# Altium PCB SHMP_MainBoard.PcbDoc (part 1 of 2)
Units mil, origin at the board's own origin, x right, y up, seen from the top; angles counter-clockwise.
Board outline 4724.41 x 2755.91 mil, 4 copper layers (Top Layer, Ground Plane, Power Plane, Bottom Layer), stack 59.692 mil thick; 115 components, 109 nets, 467 pads, 438 vias.
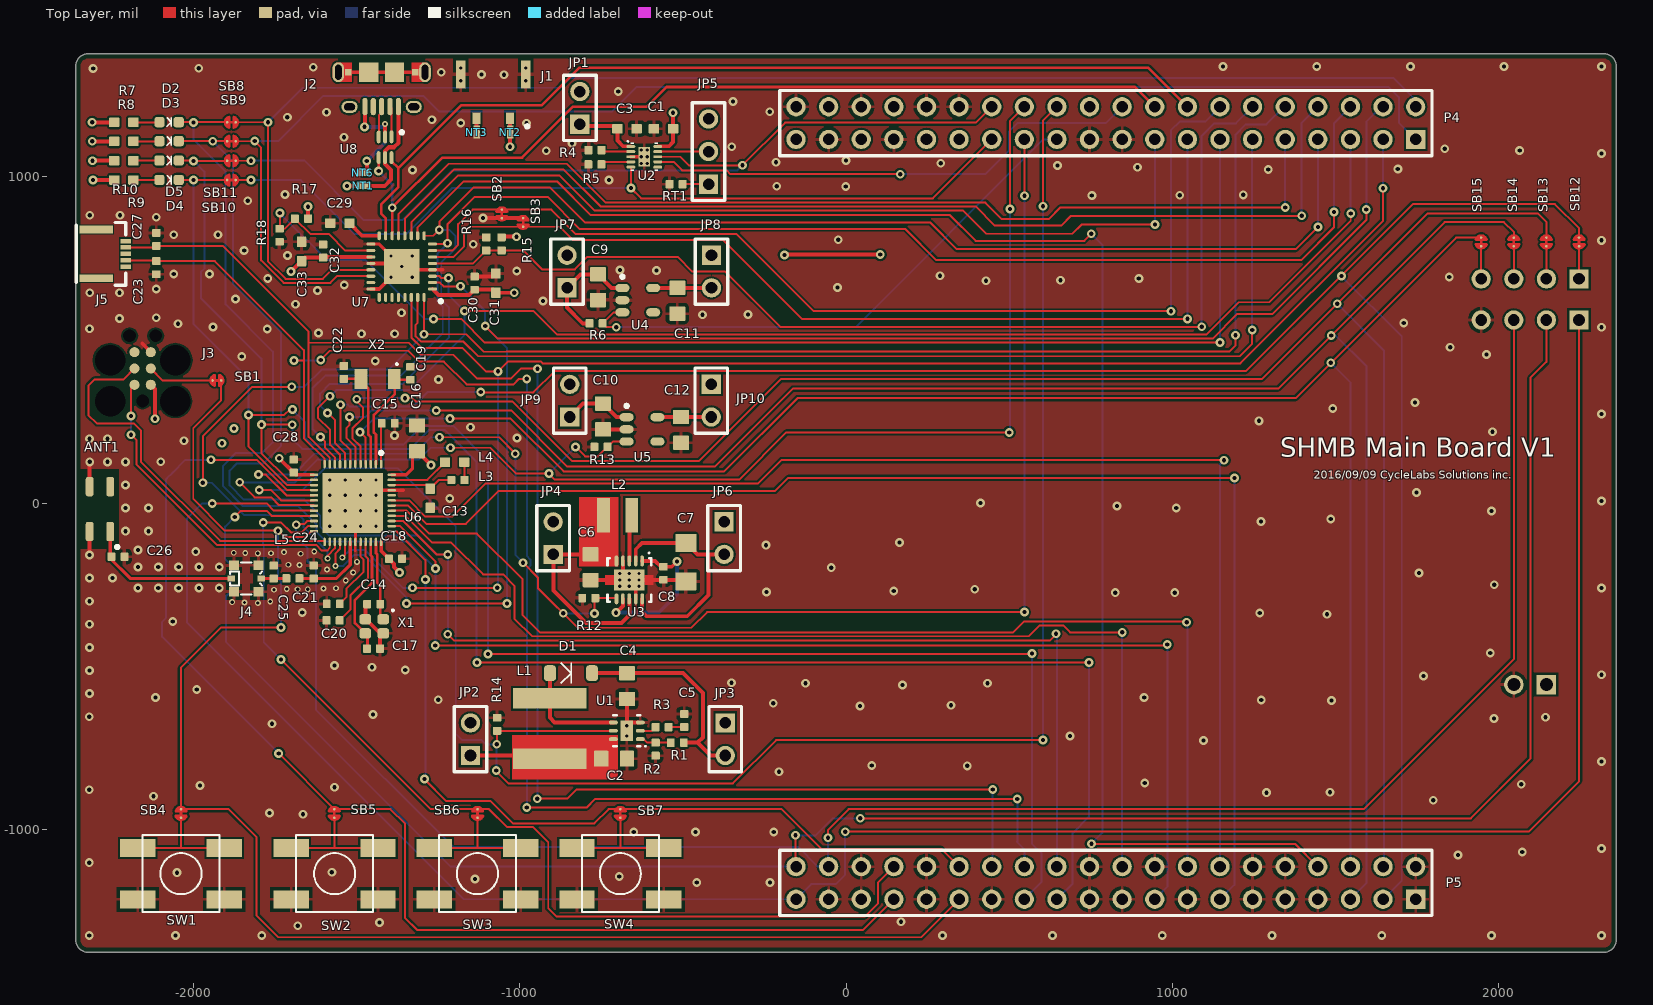
[diagram p0: Top Layer view]
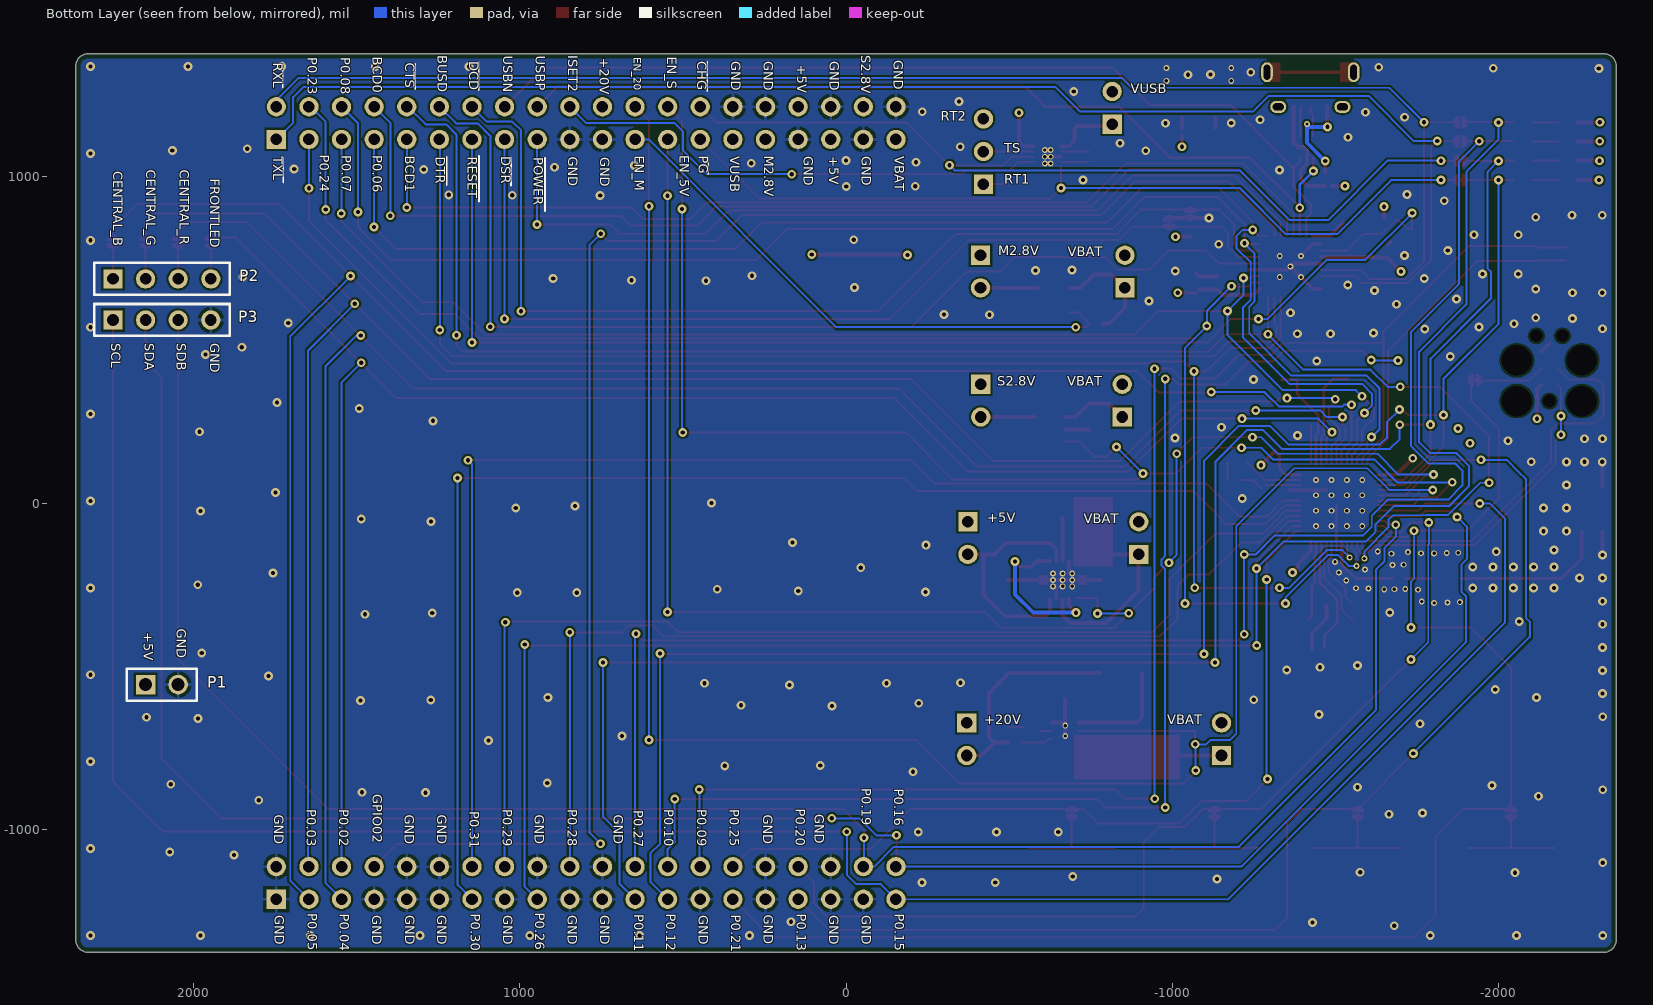
[diagram p1: Bottom Layer view, seen from below]
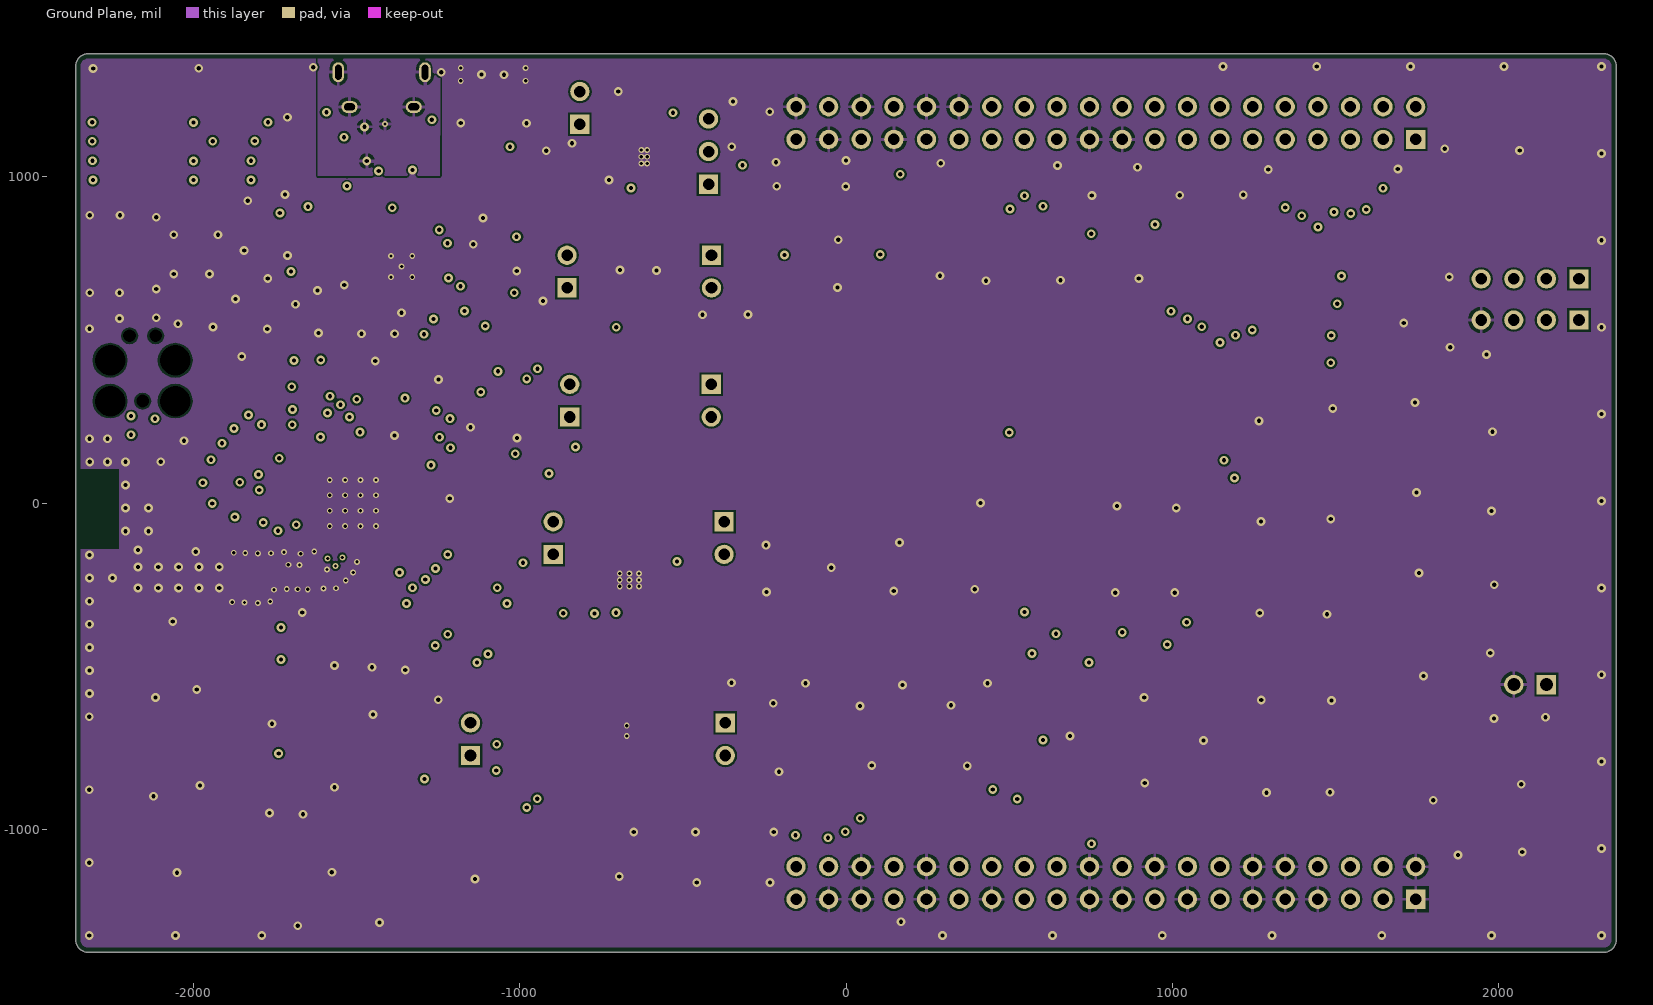
[diagram p2: Ground Plane]
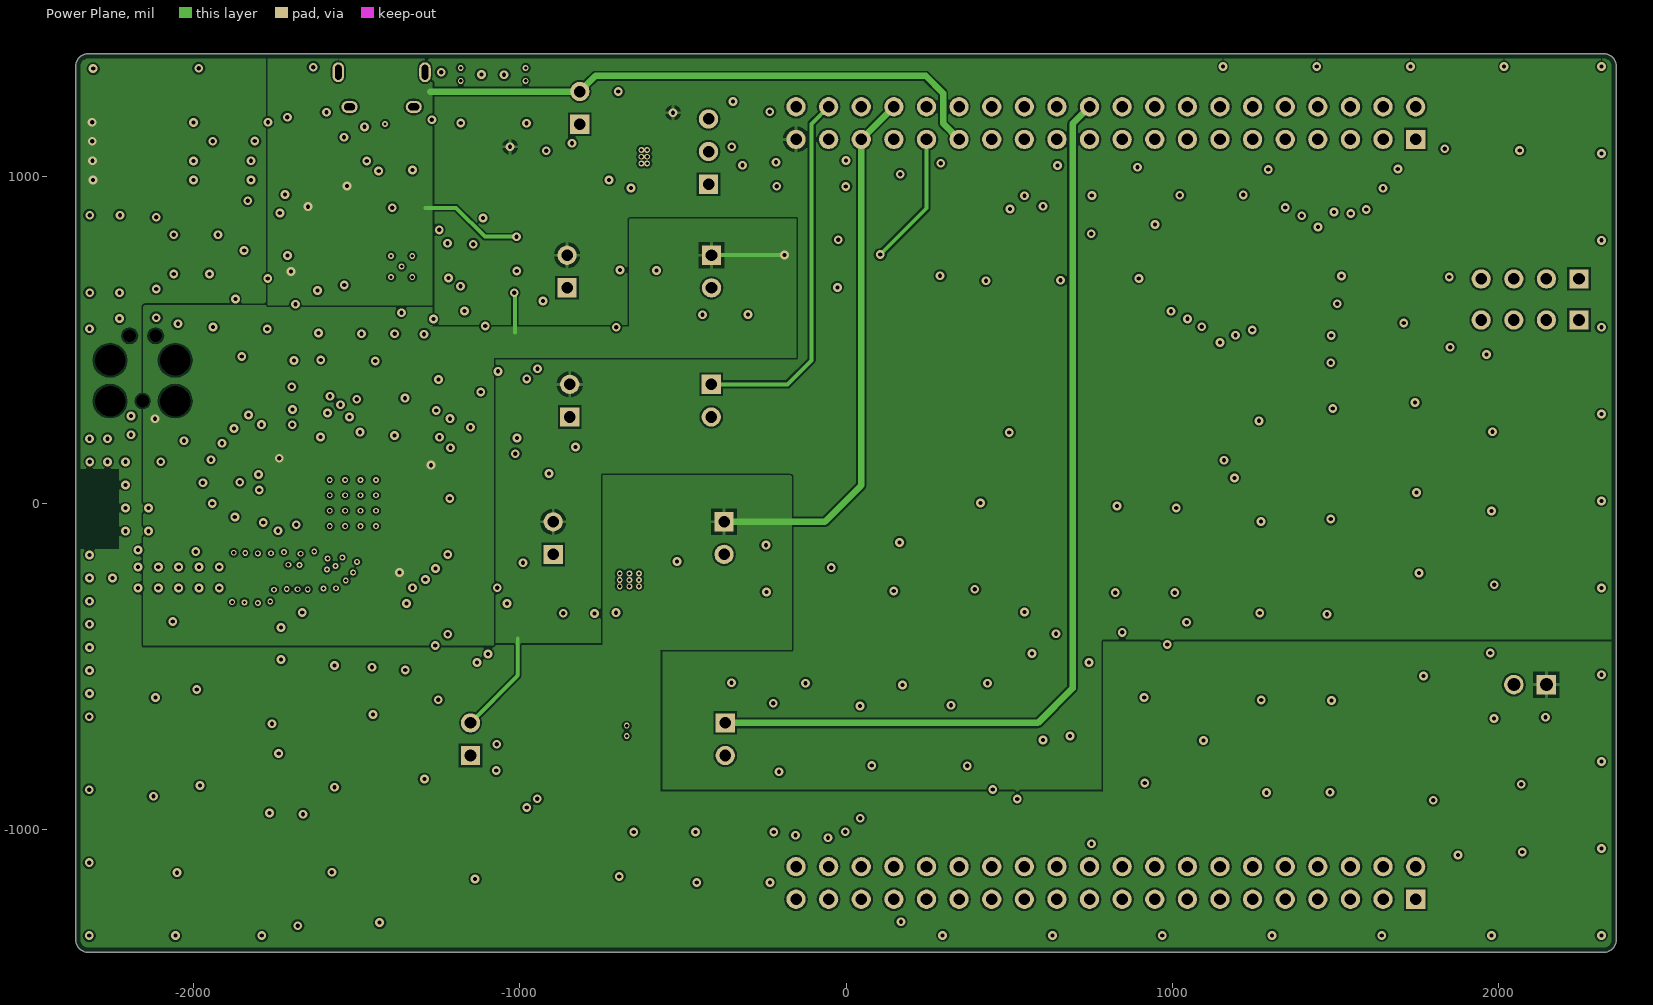
[diagram p3: Power Plane]

## Layer stack, top to bottom
Top Solder: solder mask 1, Solder Resist, Dk 4.8
Top Layer: signal copper 1.38
Prepreg Top: prepreg 6.811, 2116+1080, Dk 4.8
Ground Plane: signal copper 1.38
PCB Core: core 40.55, S1000-2, Dk 4.8
Power Plane: signal copper 1.38
Prepreg Bottom: prepreg 6.811, 2116+1080, Dk 4.8
Bottom Layer: signal copper 1.38
Bottom Solder: solder mask 1, Solder Resist, Dk 4.8

## Board outline
-2362.2,-1338.58 -2362.2,1338.58 cw(c-2322.83,1338.58) -2322.83,1377.95 2322.83,1377.95 cw(c2322.83,1338.58) 2362.2,1338.58 2362.2,-1338.58 cw(c2322.83,-1338.58) 2322.83,-1377.95 -2322.83,-1377.95 cw(c-2322.83,-1338.58)

## Design rules (kind name [scope] priority, off if disabled: settings)
AcuteAngle [All] p1: minimum=6.00000000000000E+0001 checktracksonly=TRUE
AssemblyTestPointUsage AssemblyTestPointUsage_NoTP [InNet('ANT') Or InNet('RF') Or InNet('NetC20_2')  Or InNet('P0.09/NFC1') Or InNet('P0.10/NFC2') Or InNet('XC_N') Or InNet('XC_P') Or InNet('XL_N') Or InNet('XL_P')] p1: valid=1
AssemblyTestPointUsage AssemblyTestPointUsage_Power [InNet('VDD_NRF') Or InNet('VLED') OR InNet('PGND') OR InNet('GND') OR InNet('VBZ') OR InNet('VUSB') Or InNet('VBAT') Or InNet('DGND') Or InNet('AGND') Or InNet('S2V8')] p2: allowmultiple=TRUE
AssemblyTestPointUsage [All] p3:
AssemblyTestpoint AssemblyTestpoint_TP [InComponent('TP*')] p1: testpointundercomponent=TRUE minsize=35 maxsize=59.06 preferedsize=35 minholesize=0 maxholesize=39.37 preferedholesize=10 testpointgrid=1 usegrid=FALSE gridoriginx=2810.98 gridoriginy=2760.98 gridtolerance=0.01 allowsidebottom=TRUE minspacing=83
AssemblyTestpoint AssemblyTestpoint_ShortComponents [((IsPad And (OnTopLayer Or OnBottomLayer)) Or (IsVia) Or (IsPad And OnMultiLayer)) And (IsComponent And (Height < 150))] p2: testpointundercomponent=TRUE minsize=35 maxsize=59.06 preferedsize=35 minholesize=0 maxholesize=39.37 preferedholesize=10 testpointgrid=1 usegrid=FALSE gridoriginx=2810.98 gridoriginy=2760.98 gridtolerance=0.01 allowsidebottom=TRUE minspacing=83 compbodyclearance=40
AssemblyTestpoint AssemblyTestpoint_TallComponents [(IsPad And (OnTopLayer Or OnBottomLayer)) Or (IsVia) Or (IsPad And OnMultiLayer)] p3: testpointundercomponent=TRUE minsize=35 maxsize=59.06 preferedsize=35 minholesize=0 maxholesize=39.37 preferedholesize=10 testpointgrid=1 usegrid=FALSE gridtolerance=0.01 allowsidebottom=TRUE minspacing=83 compbodyclearance=55
BoardOutlineClearance BoardOutlineClearance_Component [IsComponent] p1: gap=66
BoardOutlineClearance [All] p2: gap=15
Clearance Clearance_JLINK [InComponent('J3') vs InComponent('J3')] p1: gap=0
Clearance Clearance_Hole_Copper [InPadClass('NPTH')] p2: gap=8
Clearance Clearance_ISSIDrivers [HasFootprint('QFN-44') Or HasFootprint('DFN10')] p3: gap=4
Clearance Clearance_NFCConn [HasFootprint('Molex 051281-0594')] p4: gap=4
Clearance [All] p5: gap=6
ComponentClearance ComponentClearance_COAXSWITCH [HasFootprint('COAXIAL-SWF') Or InComponent('TP*')] p1: gap=0 collisioncheckmode=3 verticalgap=0 showdistances=FALSE
ComponentClearance [All] p2: gap=10 collisioncheckmode=3 verticalgap=10 showdistances=FALSE
DiffPairsRouting [Not InDifferentialPair('BZ_OUT')] p1: maxlimit=10 minlimit=6 mostfreqgap=8 toplayer_minwidth=6 toplayer_maxwidth=10 toplayer_prefwidth=8 midlayer1_minwidth=6 midlayer1_maxwidth=10 midlayer1_prefwidth=8 midlayer2_minwidth=6 midlayer2_maxwidth=10 midlayer2_prefwidth=8 bottomlayer_minwidth=6 bottomlayer_maxwidth=10 bottomlayer_prefwidth=8 maxuncoupledlength=500
FabricationTestPointUsage FabricationTestPointUsage_NoTP [InNet('ANT') Or InNet('RF') Or InNet('NetC20_2') Or InNet('P0.09/NFC1') Or InNet('P0.10/NFC2') Or InNet('XC_N') Or InNet('XC_P') Or InNet('XL_N') Or InNet('XL_P')] p1: valid=1 allowmultiple=FALSE
FabricationTestPointUsage FabricationTestPointUsage_Power [InNet('VDD_NRF') Or InNet('VLED') OR InNet('PGND') OR InNet('GND') OR InNet('VBZ') OR InNet('VUSB') Or InNet('VBAT') Or InNet('DGND') Or InNet('AGND') Or InNet('S2V8')] p2: valid=0 allowmultiple=TRUE
FabricationTestPointUsage [All] p3: valid=0 allowmultiple=FALSE
FabricationTestpoint FabricationTestpoint_TP [InComponent('TP*')] p1: side=2 testpointundercomponent=TRUE minsize=35 maxsize=59.06 preferedsize=35 minholesize=0 maxholesize=39.37 preferedholesize=10 testpointgrid=1 allowsidebottom=TRUE usegrid=FALSE gridtolerance=0.01 minspacing=83
FabricationTestpoint FabricationTestpoint_ShortComponents [((IsPad And (OnTopLayer Or OnBottomLayer)) Or (IsVia) Or (IsPad And OnMultiLayer)) And (IsComponent And (Height < 150))] p2: side=2 testpointundercomponent=TRUE minsize=35 maxsize=59.06 preferedsize=35 minholesize=0 maxholesize=39.37 preferedholesize=10 testpointgrid=1 allowsidebottom=TRUE usegrid=FALSE gridtolerance=0.01 minspacing=83 compbodyclearance=40
FabricationTestpoint FabricationTestpoint_TallComponents [(IsPad And (OnTopLayer Or OnBottomLayer)) Or (IsVia) Or (IsPad And OnMultiLayer)] p3: side=2 testpointundercomponent=TRUE minsize=35 maxsize=59.06 preferedsize=35 minholesize=0 maxholesize=39.37 preferedholesize=10 testpointgrid=1 allowsidebottom=TRUE usegrid=FALSE gridoriginx=2810.98 gridoriginy=2760.98 gridtolerance=0.01 minspacing=83 compbodyclearance=55
FanoutControl Fanout_LCC [IsLCC] p1: bgadir=Out bgaviamode=Centered fanoutstyle=Auto fanoutdirection=Alternating viagrid=1 // Fanout_LCC (Default Rule)
FanoutControl Fanout_BGA [IsBGA] p2: bgadir=Out bgaviamode=Centered fanoutstyle=Auto fanoutdirection=Alternating viagrid=1 // Fanout_BGA (Default Rule)
FanoutControl Fanout_Small [(CompPinCount < 5)] p3: bgadir=Out bgaviamode=Centered fanoutstyle=Auto fanoutdirection=OutThenIn viagrid=1 // Fanout_Small (Default Rule)
FanoutControl Fanout_SOIC [IsSOIC] p4: bgadir=Out bgaviamode=Centered fanoutstyle=Auto fanoutdirection=Alternating viagrid=1 // Fanout_SOIC (Default Rule)
Height HeightTop [OnTop] p1 off: minheight=0 maxheight=84.25 prefheight=78.74
Height HeightBottom [TouchesRoom('BatteryRoom')] p2 off: minheight=0 maxheight=78.74 prefheight=39.37
HoleSize [All] p1: absolutevalues=TRUE maxlimit=100 minlimit=10 maxpercent=80.000 minpercent=20.000
HoleToHoleClearance [All] p1: gap=6 allowstackedmicrovias=TRUE
MinimumAnnularRing [All] p1: minimumring=4
MinimumSolderMaskSliver MinimumSolderMaskSliver_QFN_DFN [IsVia And (HasFootprint('DSQ10-1500X900TP') Or HasFootprint('QFN-44')) vs IsVia And (HasFootprint('DSQ10-1500X900TP') Or HasFootprint('QFN-44'))] p1: minsoldermaskwidth=0
MinimumSolderMaskSliver MinimumSolderMaskSliver_QFN_DFN_1 [HasFootprint('QFN40P600X600X90-48N') Or HasFootprint('DSQ10-1500X900TP') Or HasFootprint('DRC10-2400X1650TP') Or HasFootprint('DRV6-1600X1000TP') Or HasFootprint('WDFN8') Or HasFootprint('59453061110ECHLF') vs HasFootprint('QFN40P600X600X90-48N') Or HasFootprint('DSQ10-1500X900TP') Or HasFootprint('DRC10-2400X1650TP') Or HasFootprint('DRV6-1600X1000TP') Or HasFootprint('WDFN8') Or HasFootprint('59453061110ECHLF')] p2: minsoldermaskwidth=2
MinimumSolderMaskSliver MinimumSolderMaskSliver_QFN_DFN_2 [IsPad And (HasFootprint('QFN-44')) vs IsPad And (HasFootprint('QFN-44'))] p3: minsoldermaskwidth=0
MinimumSolderMaskSliver [All] p4: minsoldermaskwidth=4
PolygonConnect PolygonConnect_Direct [(IsVia And InNet('GND')) Or (IsVia And InNet('+5V')) Or (IsVia And InNet('+20V')) Or (IsVia And InNet('VBUS')) Or (IsVia And InNet('VUSB')) Or (IsVia And InNet('S2.8V')) Or (IsVia And InNet('VDD_NRF')) Or HasFootprint('NetTiePWR')] p1: connectstyle=Direct reliefconductorwidth=10 reliefentries=4 polygonreliefangle="90 Angle" airgapwidth=10
PolygonConnect [All] p2: connectstyle=Relief reliefconductorwidth=10 reliefentries=4 polygonreliefangle="90 Angle" airgapwidth=10
RoutingVias [All] p1: holewidth=13 width=27 viastyle="Through Hole" minholewidth=10 minwidth=18 maxholewidth=28 maxwidth=50
SilkToBoardRegionClearance SilkToBoardRegionClearance_1 [All] p2:
SolderMaskExpansion SolderMaskExpansion_QFN_DFN_SON_Molex [HasFootprint('QFN-44') Or HasFootprint('QFN40P600X600X90-48N') Or HasFootprint('DRC10-2400X1650TP') Or HasFootprint('DSQ10-1500X900TP') Or HasFootprint('QFN-32-TP') Or HasFootprint('DRV6-1600X1000TP') Or HasFootprint('Molex 051281-0594')] p1: expansion=0
SolderMaskExpansion [All] p2: expansion=3
Width Width_RF [InNet('ANT') Or InNet('RF') Or InNet('NetC17_2')] p1 off: maxlimit=20 minlimit=10.43 preferedwidth=15 toplayer_maxwidth=10.43 toplayer_prefwidth=10.43 midlayer1_minwidth=12 midlayer2_minwidth=12 bottomlayer_maxwidth=10.43 bottomlayer_prefwidth=10.43 impedancedriven=TRUE minimp=0.000000 maximp=500.000000 favimp=200.000000
Width Width_Power [InNet('VBAT_P') Or InNet('+5V') Or InNet('+20V') Or InNet('VDD_NRF') Or InNet('S2.8V') Or InNet('AVDD') Or InNet('GND') Or InNet('AGND') Or InNet('PGND') Or InNet('DGND') Or InNet('VUSB') Or InNet('VBUS') Or InNet('NetC3_1') Or InNet('VBAT') Or InNet('NetC2_1') Or InNet('NetC4_1') Or InNet('NetC6_1') Or InNet('NetC7_1') Or InNet('NetC9_1') Or InNet('VAUX') Or InNet('NetC10_1') Or InNet('NetC11_1') Or InNet('NetC12_1') Or InNet('NetD1_2') Or InNet('NetL2_2') Or InNet('VCCD') Or InNet('VBAT_N') Or InNet('USBGND')] p2: maxlimit=50 minlimit=8 preferedwidth=12
Width [All] p3: maxlimit=16 minlimit=6 preferedwidth=6
16 further rules are at their usual default settings.

## Classes and differential pairs
component class 1_TOP: D2 D3 D4 D5 J1 J2 J3 P1 P2 P3 P4 P5 P? R7 R8 R9 R10 SB1 SB4 SB5 SB6 SB7 SB8 SB9 SB10 SB11 SB12 SB13 SB14 SB15 SW1 SW2 SW3 SW4
component class U_2_PWR: C1 C2 C3 C4 C5 C6 C7 C8 C9 C10 C11 C12 C? D1 JP1 JP2 JP3 JP4 JP5 JP6 JP7 JP8 JP9 JP10 L1 L2 NT2 NT3 R1 R2 R3 R4 R5 R6 RT1 U1 U2 U3 U4 U5
component class U_3_BLE: ANT1 C13 C14 C15 C16 C17 C18 C19 C20 C21 C22 C23 C24 C25 C26 C27 C28 J4 J5 L3 L4 L5 L6 L7 R12 R13 R14 U6 X1 X2
component class U_4_MISC: C29 C30 C31 C32 C33 NT1 NT6 R15 R16 R17 R18 SB2 SB3 U7 U8
differential pair XL: +XL_P -XL_N
differential pair XC: +XC_P -XC_N
differential pair USB_D: +USB_D_P -USB_D_N

## Components (designator, comment, footprint, x,y, rotation, side; value= is the part's Value field where it differs from the comment)
ANT1 "#NAME?" 2450AT42E010B -2287.88,-18.7 r270 top
C1 "4.7 uF" Varitron_CAP0603 -559.6,1147.8 r180 top
C2 "4.7 uF" Varitron_CAP0805 -711.2,-784.1 r0 top
C3 "4.7 uF" Varitron_CAP0603 -671.6,1147.8 r0 top
C4 "4.7 uF" Varitron_CAP0805 -671.7,-561.3 r270 top
C5 "680 pF" Varitron_CAP0402 -496.1,-666.8 r90 top
C6 "10 uF" Varitron_CAP0805 -782.8,-196.89 r270 top
C7 "47 uF" Varitron_CAP1206 -490.5,-181.49 r270 top
C8 "100 nF" Varitron_CAP0402 -559.7,-215.49 r270 top
C9 "10 uF" Varitron_CAP0805 -760.3,661.7 r270 top
C10 "10 uF" Varitron_CAP0805 -745.3,265.2 r270 top
C11 "10 uF" Varitron_CAP0805 -517.2,620.2 r270 top
C12 "10 uF" Varitron_CAP0805 -505.7,224.1 r270 top
C13 "1.0 uF" Varitron_CAP0603 -1275.1,14.6 r270 top
C14 "12 pF" Varitron_CAP0402 -1448.3,-309.8 r180 top
C15 "100 nF" Varitron_CAP0402 -1403.6,244.3 r0 top
C16 "4.7 uF" Varitron_CAP0805 -1315.4,198.4 r90 top
C17 "12 pF" Varitron_CAP0402 -1449,-446.3 r0 top
C18 "100 nF" Varitron_CAP0402 -1381.2,-170.8 r0 top
C19 "12 pF" Varitron_CAP0402 -1335.7,397.8 r270 top
C20 "100 pF" Varitron_CAP0402 -1572.6,-359.9 r180 top
C21 "DNP" Varitron_CAP0402 -1572.3,-309.4 r180 top
C22 "12 pF" Varitron_CAP0402 -1539.8,400.5 r270 top
C23 "300 pF" Varitron_CAP0402 -2114.8,721.7 r270 top
C24 "0.8 pF" VARITRON_CAP0402 -1632.38,-211.5 r270 top
C25 "DNP" VARITRON_CAP0402 -1754.98,-211.7 r270 top
C26 "1.2 pF" VARITRON_CAP0402 -2232.48,-164.7 r180 top
C27 "300 pF" Varitron_CAP0402 -2114.8,808.3 r90 top
C28 "100 nF" Varitron_CAP0402 -1693.7,113.4 r90 top
C29 "1.0 uF" Varitron_CAP0603 -1552,858.2 r180 top
C30 "100 nF" Varitron_CAP0402 -1138.9,674.1 r90 top
C31 "4.7 uF" Varitron_CAP0603 -1073.6,674.3 r90 top
C32 "100 nF" Varitron_CAP0402 -1603.5,772.8 r90 top
C33 "4.7 uF" Varitron_CAP0603 -1669.5,771.3 r90 top
D1 "#NAME?" ONSC-SOD-123-2-425-04_V -843.2,-521.4 r180 top
D2 "LTST-C191KGKT" LTST-C191KGKT -2075.7,1167.8 r180 top
D3 "LTST-C191KGKT" LTST-C191KGKT -2075.7,1109.5 r180 top
D4 "LTST-C191KGKT" LTST-C191KGKT -2075.7,990.8 r180 top
D5 "LTST-C191KGKT" LTST-C191KGKT -2075.7,1050.1 r180 top
J1 "BM02(3)B-ADHSS-GAN-ETB" BM02(3)B-ADHSS-GAN-ETB -1081.7,1180.4 r270 top
J2 "10118194-0001LF" 10118194-0001LF -1423.83,1215.59 r180 top
J3 "" JLINK_6PIN_NEEDLE_ADAPTER -2156.8,412.5 r90 top
J4 "#NAME?" COAXIAL-SWF -1839.08,-231.4 r270 top
J5 "#NAME?" "Molex 051281-0594" -2208.5,803.28 r270 top
JP1 "JMP_2PINS_100MILS" HDR_2X1_100MILS -816.1,1161.7 r180 top
JP2 "JMP_2PINS_100MILS" HDR_2X1_100MILS -1151.4,-774.2 r180 top
JP3 "JMP_2PINS_100MILS" HDR_2X1_100MILS -370.2,-674.2 r0 top
JP4 "JMP_2PINS_100MILS" HDR_2X1_100MILS -897.9,-157.68 r180 top
JP5 "JMP_3PINS_100MILS" HDR_1X3_100MILS -421.5,977.7 r90 top
JP6 "JMP_2PINS_100MILS" HDR_2X1_100MILS -373.8,-57.49 r0 top
JP7 "JMP_2PINS_100MILS" HDR_2X1_100MILS -855.3,659.7 r180 top
JP8 "JMP_2PINS_100MILS" HDR_2X1_100MILS -412.5,759.7 r0 top
JP9 "JMP_2PINS_100MILS" HDR_2X1_100MILS -847.1,263.8 r180 top
JP10 "JMP_2PINS_100MILS" HDR_2X1_100MILS -413.1,363.8 r0 top
L1 "10 uH" SRN5020-100M -908.2,-691.5 r90 top
L2 "2.2 uH" SRN3015-2R2M -700.5,-37.89 r0 top
L3 "15 nH" Varitron_IND0402 -1190,70.6 r0 top
L4 "10 uH" Varitron_IND0603 -1200.1,125.1 r180 top
L5 "3.9 nH" VARITRON_IND0402 -1695.98,-231.4 r180 top
NT1 "NetTiePWR" NetTiePWR -1460.6,982.3 r180 top net-tie
NT2 "NetTiePWR" NetTiePWR -1040.2,1157.4 r270 top net-tie
NT3 "NetTiePWR" NetTiePWR -1142.9,1157.5 r270 top net-tie
NT6 "NetTiePWR" NetTiePWR -1461.2,1022.9 r180 top net-tie
P1 "MTLW-102-05-G-S-172" SMTC-MTLW-102-05-X-S-172 2147.7,-556.86 r180 bottom locked
P2 "MTLW-104-07-L-S-125" SMTC-MTLW-104-07-X-S-125 2247.7,687.2 r180 bottom locked
P3 "MTLW-104-07-L-S-125" SMTC-MTLW-104-07-X-S-125 2247.7,561.26 r180 bottom locked
P4 "HDR_2x20_100MILS" HDR_2X20_100MILS 1746.8,1115 r180 top
P5 "HDR_2x20_100MILS" HDR_2X20_100MILS 1746.8,-1215 r180 top
R1 "510k Ohm" Varitron_RES0402 -517.4,-734.8 r0 top
R2 "33k Ohm" Varitron_RES0402 -584,-754.7 r90 top
R3 "10k Ohm" Varitron_RES0402 -564.1,-687.2 r0 top
R4 "560 Ohm" Varitron_RES0402 -769.7,1082.3 r180 top
R5 "1k Ohm" Varitron_RES0402 -770,1038.1 r180 top
R6 "100k Ohm" Varitron_RES0402 -766.2,550.7 r180 top
R7 "300 Ohm" Varitron_RES0603 -2214.4,1167.4 r180 top
R8 "300 Ohm" Varitron_RES0603 -2214.4,1109.1 r180 top
R9 "300 Ohm" Varitron_RES0603 -2214.4,990.4 r180 top
R10 "300 Ohm" Varitron_RES0603 -2214.4,1049.7 r180 top
R12 "100k Ohm" Varitron_RES0402 -788.6,-291.39 r0 top
R13 "100k Ohm" Varitron_RES0402 -751.5,171.9 r0 top
R14 "100k Ohm" Varitron_RES0402 -1070,-678.6 r90 top
R15 "12k Ohm" Varitron_RES0402 -1056.2,794.6 r90 top
R16 "12k Ohm" Varitron_RES0402 -1103.3,794.6 r90 top
R17 "10k Ohm" Varitron_RES0402 -1669.8,872.1 r0 top
R18 "12k Ohm" Varitron_RES0402 -1737,821 r90 top
RT1 "#NAME?" Varitron_RES0402 -521,977.8 r0 top
SB1 "Solderbridge" Solderbridge_Shorted -1915.8,375.7 r180 top net-tie
SB2 "Solderbridge" Solderbridge_Shorted -1055,873.1 r90 top net-tie
SB3 "Solderbridge" Solderbridge_Shorted -990.2,873.7 r270 top net-tie
SB4 "Solderbridge" Solderbridge_Shorted -2039.1,-938.7 r270 top net-tie
SB5 "Solderbridge" Solderbridge_Shorted -1568.9,-938.7 r270 top net-tie
SB6 "Solderbridge" Solderbridge_Shorted -1129.9,-938.7 r270 top net-tie
SB7 "Solderbridge" Solderbridge_Shorted -691.7,-938.7 r270 top net-tie
SB8 "Solderbridge" Solderbridge_Shorted -1871.3,1167.3 r180 top net-tie
SB9 "Solderbridge" Solderbridge_Shorted -1871.3,1109.3 r180 top net-tie
SB10 "Solderbridge" Solderbridge_Shorted -1871.3,990.4 r180 top net-tie
SB11 "Solderbridge" Solderbridge_Shorted -1871.3,1049.5 r180 top net-tie
SB12 "Solderbridge" Solderbridge_Shorted 2247.7,787.3 r90 top net-tie
SB13 "Solderbridge" Solderbridge_Shorted 2147.7,787.3 r90 top net-tie
SB14 "Solderbridge" Solderbridge_Shorted 2047.9,787.3 r90 top net-tie
SB15 "Solderbridge" Solderbridge_Shorted 1947.4,787.3 r90 top net-tie
SW1 "PB SW" ALPS_SKHUxxx010_WO_GND -2039.1,-1136.6 r180 top
SW2 "PB SW" ALPS_SKHUxxx010_WO_GND -1568.17,-1136.6 r180 top
SW3 "PB SW" ALPS_SKHUxxx010_WO_GND -1130.03,-1136.6 r180 top
SW4 "PB SW" ALPS_SKHUxxx010_WO_GND -691.9,-1136.6 r180 top
U1 "TPS61170DRVR" DRV6-1600X1000TP -672.14,-698.51 r180 top
U2 "#NAME?" DSQ10-1500X900TP -618.6,1061.7 r270 top
U3 "TPS61202DRCR" DRC10-2400X1650TP -664.4,-235.78 r270 top
U4 "TLV70028DDCR" SOT23-5_N -638.4,622 r0 top
U5 "TLV70028DDCR" SOT23-5_N -625.6,225.82 r0 top
U6 "#NAME?" QFN40P600X600X90-48N -1512.18,0 r270 top
U7 "#NAME?" QFN-32-TP -1362.46,725.01 r180 top
U8 "#NAME?" ST-SOT666 -1413.3,1090.9 r180 top
X1 "#NAME?" CRYSTAL_2016_4Pins -1446.44,-378.05 r180 top
X2 "#NAME?" CRYSTAL_3215_2Pins -1436.42,379.68 r180 top

## Footprints (in the part's own frame and the unit in brackets; to place one, negate y for a bottom-side part, rotate by r counter-clockwise, add the part's x,y. Pads: shape width x height; smd on the part's side, far side on the other; paste and mask are expansions set on the pad)
2450AT42E010B [mm] "2.4 GHz Low Profile Mini Chip Antenna, Above Metal, 4 pads, 1.5 x 0.6 mm pads, 3.5 x 1.6 mm pitch, 6.26 x 3 mm metal clearance"
  rrect50% 1.5x0.6 smd: 1(1.75,0.8) 2(-1.75,0.8) 3(-1.75,-0.8) 4(1.75,-0.8)
  Top Layer pour cut-out: -3.13,-1.5 -3.13,1.5 3.13,1.5 3.13,-1.5
  silkscreen extent 2.83,1.23 3.07,1.48, body extent -2.5,-1 2.5,1, height 1.52
10118194-0001LF [mm] "Micro USB B Type Receptacle, 5 pins, 0.4 x 1.35 mm pads"
  rrect100% 0.9x1.55 hole 0.5 slot 1.15 at 90 deg: 0(-3.375,-2.675) 0(3.375,-2.675)
  rect 0.5x0.5 smd paste-0.1 mask-0.1: 0(-2.6,-2.675) 0(2.6,-2.675)
  rrect100% 1.25x0.95 hole 0.55 slot 0.85 at 0 deg: 0(-2.5,0.025) 0(2.5,0.025)
  rect 1.5x1.55 smd: 0(-1,-2.675) 0(1,-2.675)
  oval 0.4x1.35 smd mask+0.051: 1(-1.3,0) 2(-0.65,0) 3(0,0) 4(0.65,0) 5(1.3,0)
  Top Layer region: -3.325,-3.425 -3.516,-3.387 -3.679,-3.279 -3.787,-3.116 -3.825,-2.925 -3.825,-2.925 -3.825,-2.425 -3.787,-2.234 -3.679,-2.071 -3.516,-1.963 -3.325,-1.925 -3.325,-1.925 -2.325,-1.925 -2.325,-3.425
  Top Layer region: 3.325,-1.925 3.516,-1.963 3.679,-2.071 3.787,-2.234 3.825,-2.425 3.825,-2.425 3.825,-2.925 3.787,-3.116 3.679,-3.279 3.516,-3.387 3.325,-3.425 3.325,-3.425 2.325,-3.425 2.325,-1.925
  body extent -3.7,-4.82 3.7,0.13, height 3.06
ALPS_SKHUxxx010_WO_GND [mm]
  rect 2.75x1.4 smd: 1(-3.375,2) 1(3.375,2) 2(-3.375,-2) 2(3.375,-2)
  silkscreen extent -3,-3 3,3, body extent -4,-3 4,3.3, height 3.1
BM02(3)B-ADHSS-GAN-ETB [mm] "ADH Connector, 2 pins, 0.9 x 0.6 mm pads, 2 mecanical pads 2.2 x 0.75 mm"
  rect 2.2x0.75 smd: 0(-3.4,2.525) 0(-3.4,-2.525)
  rect 0.9x0.6 smd: 1(0,1.3) 2(0,-1.3)
  silkscreen extent 0.53,2.53 0.77,2.78, body extent -4,-2.85 0.3,2.85, height 1.9
COAXIAL-SWF [mm]
  rect 0.5x0.58 smd: 1(0,1.16) 3(0,-1.16)
  rect 0.75x0.8 smd: 2(-1.025,0.95) 2(-1.025,-0.95) 2(1.025,0.95) 2(1.025,-0.95)
  Top Layer pour cut-out: 0.65,-0.55 -0.65,-0.55 -0.65,-1.35 0.65,-1.35
  Top Layer pour cut-out: -0.65,0.55 0.65,0.55 0.65,1.35 -0.65,1.35
  silkscreen extent -1.25,-1.25 1.25,1.25
CRYSTAL_2016_4Pins [mm] "CRYSTAL 2.0 x 1.6 mm, 4 Pads, 1.4 mm Horizontal Pitch, 1.1 mm Vertical Pitch"
  rrect50% 0.9x0.8 smd: 1(-0.7,-0.55) 2(0.7,-0.55) 3(0.7,0.55) 4(-0.7,0.55)
  silkscreen extent -1.47,-1.27 -1.42,-1.22, body extent -1,-0.8 1,0.8, height 0.4
CRYSTAL_3215_2Pins [mm] "CRYSTAL 3.2 x 1.5 x 0.8 mm, 2 Pads 1.0 x 1.55 mm, 2.6 mm pitch"
  rect 1x1.55 smd: 1(-1.3,0) 2(1.3,0)
  silkscreen extent -1.53,-1.2 -1.47,-1.15, body extent -1.6,-0.75 1.6,0.75, height 0.8
DRC10-2400X1650TP [mm] "SON, 10-Leads, Body 3x3mm, Pitch 0.5mm, Thermal Pad 2.4x1.65mm, TI Recommended"
  oval 0.85x0.28 smd paste-0.025 mask+0.07: 1(-1.475,1) 2(-1.475,0.5) 3(-1.475,0) 4(-1.475,-0.5) 5(-1.475,-1) 6(1.475,-1) 7(1.475,-0.5) 8(1.475,0) 9(1.475,0.5) 10(1.475,1)
  rect 1.65x2.4 smd paste-0.825 mask+0.07: 11(0,0)
  Top Layer region: -0.39,1.2 -0.11,1.2 -0.11,1.9 -0.39,1.9
  Top Layer region: 0.39,1.9 0.11,1.9 0.11,1.2 0.39,1.2
  Top Layer region: 0.39,-1.2 0.11,-1.2 0.11,-1.9 0.39,-1.9
  Top Layer region: -0.39,-1.9 -0.11,-1.9 -0.11,-1.2 -0.39,-1.2
  silkscreen extent -2.15,-1.7 1.7,1.7, body extent -1.55,-1.55 1.55,1.55, height 1
DRV6-1600X1000TP [mm] "SON, 6-Leads, Body 2x2mm, Pitch 0.65mm, Thermal Pad 1.6x1mm, TI Recommended"
  oval 0.7x0.3 smd paste-0.025 mask+0.07: 1(-1.05,0.65) 2(-1.05,0) 3(-1.05,-0.65) 4(1.05,-0.65) 5(1.05,0) 6(1.05,0.65)
  rect 1x1.6 smd paste-0.5 mask+0.07: 7(0,0)
  silkscreen extent -1.5,-1.2 1.05,1.25, body extent -1.05,-1.05 1.05,1.05, height 0.8
DSQ10-1500X900TP [mm] "WSON-10, 10 pins, 0.23 x 0.7 mm pads, 0.4 x 2.1 mm pitch, Thermal pad 0.9 x 1.5 mm"
  oval 0.23x0.7 smd mask+0.051: 1(-0.8,-1.05) 2(-0.4,-1.05) 3(0,-1.05) 4(0.4,-1.05) 5(0.8,-1.05) 6(0.8,1.05) 7(0.4,1.05) 8(0,1.05) 9(-0.4,1.05) 10(-0.8,1.05)
  rect 1.5x0.9 smd mask+0.051: 11(0,0)
  silkscreen extent -1.25,-1.32 1.05,1.05, body extent -1.05,-1.05 1.05,1.05, height 0.8
HDR_1X3_100MILS [mm] "Header 100 mils, 1 row, 3 pins. 0.9mm hole, 1.5 mm side"
  rect 1.5x1.5 hole 0.9: 1(0,0)
  round 1.5 hole 0.9: 2(2.54,0) 3(5.08,0)
  silkscreen extent -1.27,-1.27 6.35,1.27
HDR_2X1_100MILS [mm] "Header 100 mils, 2 rows, 2 pins. 0.9mm hole, 1.5 mm side"
  rect 1.5x1.5 hole 0.9: 1(0,0)
  round 1.5 hole 0.9: 2(0,-2.54)
  silkscreen extent -1.27,-3.81 1.27,1.27
HDR_2X20_100MILS [mm] "Header 100 mils, 2 rows, 40 pins. 0.9mm hole, 1.5 mm side"
  rect 1.5x1.5 hole 0.9: 1(0,0)
  round 1.5 hole 0.9: 2(0,-2.54) 3(2.54,0) 4(2.54,-2.54) 5(5.08,0) 6(5.08,-2.54) 7(7.62,0) 8(7.62,-2.54) 9(10.16,0) 10(10.16,-2.54) 11(12.7,0) 12(12.7,-2.54) 13(15.24,0) 14(15.24,-2.54) 15(17.78,0) 16(17.78,-2.54) 17(20.32,0) 18(20.32,-2.54) 19(22.86,0) 20(22.86,-2.54) 21(25.4,0) 22(25.4,-2.54) 23(27.94,0) 24(27.94,-2.54) 25(30.48,0) 26(30.48,-2.54) 27(33.02,0) 28(33.02,-2.54) 29(35.56,0) 30(35.56,-2.54) 31(38.1,0) 32(38.1,-2.54) 33(40.64,0) 34(40.64,-2.54) 35(43.18,0) 36(43.18,-2.54) 37(45.72,0) 38(45.72,-2.54) 39(48.26,0) 40(48.26,-2.54)
  silkscreen extent -1.27,-3.81 49.53,1.27
JLINK_6PIN_NEEDLE_ADAPTER [mil] "JLINK 6 PIN NEEDLE ADAPTER FOOTPRINT: Only for development (DNP)"
  round 0 hole 93.5 unplated paste-93.5: 0(-100,-100) 0(-100,100) 0(25,100) 0(25,-100)
  round 0 hole 39 unplated paste-39: 0(-100,0) 0(100,-40) 0(100,40)
  round 31 smd paste-31: 1(-50,-25) 2(-50,25) 3(0,-25) 4(0,25) 5(50,-25) 6(50,25)
  Mechanical 3 keep-out region: -50,-25 -50,25 50,25 50,-25
  Mechanical 3 keep-out region: -5.5,-193 55.5,-193 55.5,-147 -5.5,-147
  Mechanical 3 keep-out region: -130.5,-193 -69.5,-193 -69.5,-147 -130.5,-147
  Mechanical 3 keep-out region: -5.5,147 55.5,147 55.5,193 -5.5,193
  Mechanical 3 keep-out region: -130.5,147 -69.5,147 -69.5,193 -130.5,193
LTST-C191KGKT [mm] "SMD LED, 0.80 x 1.6 x 0.55 mm body, 0.8 x 0.8 mm pads, 1.5 mm pitch"
  rrect50% 0.8x0.8 smd mask+0: 1(0.75,0) 2(-0.75,0)
  silkscreen extent -0.18,-0.34 0.16,0.33, body extent -0.8,-0.4 0.8,0.4, height 0.55
"Molex 051281-0594" [mm]
  rect 0.6x2.6 smd: 0(-0.9,-2.3) 0(2.9,-2.3)
  rect 0.35x0.8 smd: 1(0,0) 2(0.5,0) 3(1,0) 4(1.5,0) 5(2,0)
  silkscreen extent -1.45,-3.85 3.45,0, body extent -1.45,-3.85 3.45,0, height 2.05
NetTiePWR [mil] "NetTie for Power Nets"
  rect 20x20 smd paste-10 mask+0: 1(10,10) 2(30,10)
ONSC-SOD-123-2-425-04_V [mil] "Schottky Power Rectifier, 2-Pin SOD-123, Pb-Free, Tape and Reel"
  rrect50% 36x48 smd: 1(-64.5,0) 2(64.5,0)
  silkscreen extent 0,-32 31,32, body extent -73,-32 73,32, height 53
QFN40P600X600X90-48N [mm]
  oval 0.65x0.2 smd: 1(-3.025,2.2) 2(-3.025,1.8) 3(-3.025,1.4) 4(-3.025,1) 5(-3.025,0.6) 6(-3.025,0.2) 7(-3.025,-0.2) 8(-3.025,-0.6) 9(-3.025,-1) 10(-3.025,-1.4) 11(-3.025,-1.8) 12(-3.025,-2.2) 25(3.025,-2.2) 26(3.025,-1.8) 27(3.025,-1.4) 28(3.025,-1) 29(3.025,-0.6) 30(3.025,-0.2) 31(3.025,0.2) 32(3.025,0.6) 33(3.025,1) 34(3.025,1.4) 35(3.025,1.8) 36(3.025,2.2)
  oval 0.2x0.65 smd: 13(-2.2,-3.025) 14(-1.8,-3.025) 15(-1.4,-3.025) 16(-1,-3.025) 17(-0.6,-3.025) 18(-0.2,-3.025) 19(0.2,-3.025) 20(0.6,-3.025) 21(1,-3.025) 22(1.4,-3.025) 23(1.8,-3.025) 24(2.2,-3.025) 37(2.2,3.025) 38(1.8,3.025) 39(1.4,3.025) 40(1,3.025) 41(0.6,3.025) 42(0.2,3.025) 43(-0.2,3.025) 44(-0.6,3.025) 45(-1,3.025) 46(-1.4,3.025) 47(-1.8,3.025) 48(-2.2,3.025)
  rect 4.7x4.7 smd: 49(0,0)
  silkscreen extent -4.02,2.08 -3.78,2.33, body extent -3,-3 3,3, height 0.9
QFN-32-TP [mm] "QFN-32, 5.0 x 5.0 x 1.0 mm body, 0.25 x 0.7 mm pads, 2.75 x 2.75 thermal pad"
  oval 0.7x0.25 smd mask+0.051: 1(-2.4,1.75) 2(-2.4,1.25) 3(-2.4,0.75) 4(-2.4,0.25) 5(-2.4,-0.25) 6(-2.4,-0.75) 7(-2.4,-1.25) 8(-2.4,-1.75) 17(2.4,-1.75) 18(2.4,-1.25) 19(2.4,-0.75) 20(2.4,-0.25) 21(2.4,0.25) 22(2.4,0.75) 23(2.4,1.25) 24(2.4,1.75)
  oval 0.25x0.7 smd mask+0.051: 9(-1.75,-2.4) 10(-1.25,-2.4) 11(-0.75,-2.4) 12(-0.25,-2.4) 13(0.25,-2.4) 14(0.75,-2.4) 15(1.25,-2.4) 16(1.75,-2.4) 25(1.75,2.4) 26(1.25,2.4) 27(0.75,2.4) 28(0.25,2.4) 29(-0.25,2.4) 30(-0.75,2.4) 31(-1.25,2.4) 32(-1.75,2.4)
  rect 2.75x2.75 smd mask+0.051: 33(0,0)
  silkscreen extent -3.18,2.58 -2.93,2.82, body extent -2.5,-2.5 2.5,2.5, height 1
SMTC-MTLW-102-05-X-S-172 [mm] "Terminal Assembly, 1x2 Pins, Vertical, 2.54mm Pitch, Male"
  rect 1.52x1.52 hole 1.02: 1(0,0)
  round 1.52 hole 1.02: 2(2.54,0)
  silkscreen extent -1.46,-1.24 4,1.24
SMTC-MTLW-104-07-X-S-125 [mm] "Terminal Assembly, 1x4 Pins, Vertical, 2.54mm Pitch, Male"
  rect 1.5x1.5 hole 0.9: 1(0,0)
  round 1.5 hole 0.9: 2(2.54,0) 3(5.08,0) 4(7.62,0)
  silkscreen extent -1.46,-1.24 9.08,1.24, body extent -1.27,-1.24 8.89,1.24, height 4.7
Solderbridge_Shorted [mm]
  round 0.2 smd paste-10: 1(0,0) 2(0.676,0)
  Top Layer region: 0.236,-0.432 0.16,-0.505 0.042,-0.467 -0.023,-0.424 -0.097,-0.351 -0.15,-0.292 -0.208,-0.193 -0.236,-0.099 -0.231,0.122 -0.206,0.193 -0.122,0.33 -0.038,0.411 0.054,0.469 0.155,0.5 0.206,0.483 0.236,0.43
  Top Layer region: 0.44,0.432 0.516,0.505 0.634,0.467 0.698,0.424 0.772,0.351 0.826,0.292 0.884,0.193 0.912,0.099 0.907,-0.122 0.881,-0.193 0.798,-0.33 0.714,-0.411 0.622,-0.469 0.521,-0.5 0.47,-0.483 0.44,-0.43
  Top Layer lines w0.152: 0.516,0.431 cw(c0.406,0) 0.516,-0.431 ; 0.159,0.431 ccw(c0.27,0) 0.159,-0.431
  Top Layer lines w0.203: 0.676,0 0,0
SOT23-5_N [mm] "SOT23, 5-Leads, Body 2.9x1.6mm, Pitch 0.95mm, Lead Span 2.8mm, IPC Medium Density"
  oval 1.1x0.65 smd: 1(-1.2,0.95) 2(-1.2,0) 3(-1.2,-0.95) 4(1.2,-0.95) 5(1.2,0.95)
  silkscreen extent -1.32,1.7 -1.07,1.95, body extent -0.9,-1.55 0.9,1.55, height 1.4
SRN3015-2R2M [mm] "Inductor, 3.0 x 3.0 x 1.5 mm, 1.0 x 2.7 pads, 2.2 mm pitch"
  rect 1x2.7 smd: 1(-1.1,0) 2(1.1,0)
  body extent -1.5,-1.5 1.5,1.5, height 1.5
SRN5020-100M [mm] "Inductor SRN5020-100M, 10 uH, 5.0 x 5.0 mm x 2.0 body, 1.6 x 5.7 mm pad, 4.7 mm pitch"
  rect 1.6x5.7 smd: 1(-2.35,0) 2(2.35,0)
  body extent -2.5,-2.5 2.5,2.5, height 2
ST-SOT666 [mm] "SOT666, 1.7 x 1.3 x 0.6 mm body, 0.99 x 0.30 pads, 0.5 x 1.115 mm pitch"
  oval 0.3x0.99 smd mask+0: 1(-0.5,-0.805) 2(0,-0.805) 3(0.5,-0.805) 4(0.5,0.805) 5(0,0.805) 6(-0.5,0.805)
  silkscreen extent -1.43,-1.29 -1.18,-1.04, body extent -0.85,-0.65 0.85,0.65, height 0.6
Varitron_CAP0402 [mil] "Capacitor 0402(1005), max 1mm height"
  rrect21% 24x26 smd: 1(-20,0) 2(20,0)
  body extent -21,-11 21,11, height 39
VARITRON_CAP0402 [mil] "Capacitor 0402(1005), max 1mm height"
  rrect21% 24x26 smd: 1(-20,0) 2(20,0)
  body extent -21,-11 21,11, height 39
Varitron_CAP0603 [mil] "Capacitor 0603(1608), max 1mm height"
  rrect17% 32x29 smd: 1(-29.5,0) 2(29.5,0)
  body extent -33,-19 33,19, height 39
Varitron_CAP0805 [mil] "Capacitor 0805(2012), max 1mm height"
  rrect11% 44x49 smd: 1(-39.5,0) 2(39.5,0)
  body extent -43,-27 43,27, height 39
Varitron_CAP1206 [mil] "Capacitor 1206(3216), max 1mm height"
  rrect9% 55x65 smd: 1(-59,0) 2(59,0)
  body extent -66,-34 66,34, height 39
Varitron_IND0402 [mil] "Inductor 0402(1005), max 1mm height"
  rrect21% 24x26 smd: 1(-20,0) 2(20,0)
  body extent -21,-11 21,11, height 39
VARITRON_IND0402 [mil] "Inductor 0402(1005), max 1mm height"
  rrect21% 24x26 smd: 1(-20,0) 2(20,0)
  body extent -21,-11 21,11, height 39
Varitron_IND0603 [mil] "Inductor 0603(1608), max 1mm height"
  rrect17% 32x29 smd: 1(-29.5,0) 2(29.5,0)
  body extent -33,-19 33,19, height 39
Varitron_RES0402 [mil] "Resistor 0402(1005), max 1mm height"
  rrect21% 24x26 smd: 1(-20,0) 2(20,0)
  body extent -21,-11 21,11, height 39
Varitron_RES0603 [mil] "Resistor 0603(1608), max 1mm height"
  rrect17% 32x29 smd: 1(-29.5,0) 2(29.5,0)
  body extent -33,-19 33,19, height 39

## Part data
ANT1: library part 2450AT42E010B, "CHIP ANTENNA, 2.45GHz, 5 x 2 x 1.5 mm body"
C1 C3 C31 C33: library part Varitron_CAP0603, "4.7 uF 10V X7R 10% 0603 (1608 Metric)  SMD"
C2 C4 C16: library part Varitron_CAP0805, "4.7 uF 50V X5R 10% 0805 (2012 Metric)  SMD"
C5: library part Varitron_CAP0402, "680 pF 10V X7R 10% 0402 (1005 Metric)  SMD"
C6 C9 C10 C11 C12: library part Varitron_CAP0805, "10 uF 10V X7R 10% 0805 (2012 Metric)  SMD"
C7: library part Varitron_CAP1206, "47 uF 10V X5R 10% 1206 (3216 Metric)  SMD"
C8 C15 C18 C28 C30 C32: library part Varitron_CAP0402, "100 nF 16V X7R 10% 0402 (1005 Metric)  SMD"
C13 C29: library part Varitron_CAP0603, "1.0 uF 16V X7R 10% 0603 (1608 Metric)  SMD"
C14 C17 C19 C22: library part Varitron_CAP0402, "12 pF 50V NP0 2% 0402 (1005 Metric)  SMD"
C20: library part Varitron_CAP0402, "100 pF 50V NP0 5% 0402 (1005 Metric)  SMD"
C21 C25: library part Varitron_CAP0402, "C nF V TEMP TOL% 0402 (1005 Metric)  SMD"
C23 C27: library part Varitron_CAP0402, "300 pF 50V NP0 5% 0402 (1005 Metric)  SMD"
C24: library part Varitron_CAP0402, "0.8 pF 50V NP0 5% 0402 (1005 Metric)  SMD"
C26: library part Varitron_CAP0402, "1.2 pF 50V NP0 ±0.1 pF 0402 (1005 Metric)  SMD"
D1: library part MBR0540T1G, "Schottky Power Rectifier, 2-Pin SOD-123, Pb-Free, Tape and Reel"
D2 D3 D4 D5: "SMT LED, Green 571nm, Discrete 2V 0603 (1608 Metric)"
J1: "Connector, 1.3 mm pitch"
J2: "Micro USB B Type Receptacle"
J3: library part JLINK_6PIN_NEEDLE_ADAPTER, "JLink 6 Pin Needle Adapter for Flasher ARM Programmer"
J4: library part Coaxial-Internal-SW, "Coaxial Connector with Switch"
J5: library part "Molex 051281-0594", "CONN FFC FPC 5POS 0.50MM R/A"
JP1 JP2 JP3 JP4 JP6 JP7 JP8 JP9 JP10: "Jumper, 100 mils, 2 pins"
JP5: "Jumper, 100 mils, 3 pins"
L1: library part SRN5020-100M, "Inductor, 10 uH, 20%, 144 mOhm DCR, 1.3A"
L2: library part SRN3015-2R2M, "Inductor, 2.2 uH, 20%, 72 mOhm DCR, 1.65A"
L3: library part Varitron_IND0402, "15 nH 5%, 320 mA, 0402 (1005 Metric)  SMD"
L4: library part Varitron_IND0603, "10 uH 10%, 80 mA, 0603 (1608 Metric)  SMD"
L5: library part Varitron_IND0402, "3.9 nH ±0.1 nH 0402 (1005 Metric)  SMD"
P1: library part SMTC-MTLW-102-05-X-S-172, "Low Profile .025\" SQ Post Header, Through-hole, Vertical, -55 to 125 degC, 2.54 mm Pitch, 2-Pin, Male, RoHS"
P2 P3: library part SMTC-MTLW-104-07-X-S-125, "Low Profile .025\" SQ Post Header, Through-hole, Vertical, -55 to 125 degC, 2.54 mm Pitch, 4-Pin, Male, RoHS"
P4 P5: "Header, 100 mils, 2 rows, 40 pins"
R1: library part Varitron_RES0402, "510k 0.063W 5%  0402 (1005 Metric)  SMD"
R2: library part Varitron_RES0402, "33k 0.063W 5%  0402 (1005 Metric)  SMD"
R3 R17: library part Varitron_RES0402, "10k 0.063W 5%  0402 (1005 Metric)  SMD"
R4: library part Varitron_RES0402, "560R 0.063W 5%  0402 (1005 Metric)  SMD"
R5: library part Varitron_RES0402, "1k 0.063W 5%  0402 (1005 Metric)  SMD"
R6 R12 R13 R14: library part Varitron_RES0402, "100k 0.063W 5%  0402 (1005 Metric)  SMD"
R7 R8 R9 R10: library part Varitron_RES0603, "300 0.063W 5%  0603 (1608 Metric)  SMD"
R15 R16 R18: library part Varitron_RES0402, "12k 0.063W 5%  0402 (1005 Metric)  SMD"
RT1: library part NTCS0402E3103FLT, "Thermistor NTC 0402, R0 10k, 1%, B 3490, SMD"
SB1 SB4 SB5 SB6 SB7 SB8 SB9 SB10 SB11 SB12 SB13 SB14 SB15: library part SOLDERBRIDGE_SHORTED, "Shorted Solderbridge"
SB2 SB3: "Shorted Solderbridge"
SW1 SW2 SW3 SW4: library part SW-PB, "ALPS - SKHUALE010 - Tactile Switch, SPNO, SMD, 6.5x6.2x2.5mm"
U1: "Boost Voltage Converter with 3 to 18 V Input and 3 to 38 V Output, -40 to 85 degC, 6-Pin SON (DRC), Green (RoHS & no Sb/Br)"
U2: library part BQ24040DSQR, "800 mA, Single-Input, Single Cell Li-Ion Battery Charger with Auto Start. Vovp=6.6 V, 3.5 V, -40 to 85 degC, 10-pin SON (DSQ), Green (RoHS & no Sb/Br)"
U3: "Boost Voltage Converter with 0.3 to 5.5 V Input and 5 V Output, -40 to 85 degC, 10-Pin SON (DRC), Green (RoHS & no Sb/Br)"
U4 U5: "200 mA Low Dropout Regulator, 2 - 5.5V Input, Fixed 2.8V Output"
U6: library part nRF52832_QFAA, "Multi-protocol Bluetooth Low Energy and 2.4GHz proprietary system-on-chip"
U7: library part CY7C65213-32LTXI, "IC USB TO UART BRIDGE 32QFN"
U8: library part USBLC6-2P6, "Very low capacitance ESD protection"
X1: library part CX2016DB32000D0WPRC1, "XTAL 32 MHz, 8pF, 3.2 x 1.5 mm, ±20 ppm Tol, ±200 ppm Drift"
X2: library part ST3215SB32768E0HPWB1, "XTAL 32.768 kHz, 9pF, 3.2 x 1.5 mm, ±20 ppm Tol, ±200 ppm Drift"

## Via types
v1: diameter 27, hole 13, Top Layer to Bottom Layer, tented top, 368 vias
v2: diameter 18, hole 10, Top Layer to Bottom Layer, 34 vias
v3: diameter 18, hole 10, Top Layer to Bottom Layer, tented top, 26 vias
v4: diameter 18, hole 10, Top Layer to Bottom Layer, tented both sides, 9 vias
v5: diameter 27, hole 13, Top Layer to Bottom Layer, 1 vias

## Nets (pads, with @x,y where several pads share a name; then routed paths per layer and width w, separated by ;. In a path a pad name is that pad's centre, name@x,y a point inside that pad or via, vN(x,y) a via of type N, cw(c..) or ccw(c..) an arc to the next point about the centre after c; other vN are vias at no path point)
+5V: JP6.1 P1.1 P4.34 P4.35 R7.2 R8.2 R9.2 R10.2 | length 1935.6
  Top Layer w12: v1(-2311.6,1167.4) R7.2@-2243.9,1167.4 ; v1(-2311.1,1109.1) R8.2@-2243.9,1109.1 ; v1(-2310.3,1049.7) R10.2@-2243.9,1049.7 ; v1(-2308.9,990.4) R9.2@-2243.9,990.4
  Power Plane w20: JP6.1@-373.8,-57.49 -64.59,-57.49 46.8,53.9 P4.35@46.8,1115 P4.34@146.8,1215
+20V: JP3.1 P4.22 | length 2913.4
  Power Plane w20: JP3.1@-370.2,-674.2 588.4,-674.2 694.7,-567.9 694.7,1162.9 P4.22@746.8,1215
ANT: ANT1.1 C26.2 J4.3 | length 479.5
  Top Layer w10.11: ANT1.1@-2256.38,-87.59 -2256.38,-170.17 -2195.36,-231.2 J4.3@-1884.75,-231.2
BCD0: P4.8 U7.12 | length 3304.3
  Top Layer w6: U7.12@-1352.62,819.5 -1352.62,871.59 -1201,1023.2 -866.7,1023.2 -752.8,909.3 398.2,909.3 456.7,850.8 660,850.8 689.9,880.7 v1(1397.5,880.7)
  Bottom Layer w6: v1(1397.5,880.7) 1396.5,881.7 1396.5,1164.7 P4.8@1446.8,1215
BCD1: P4.9 U7.13 | length 3143.1
  Top Layer w6: U7.13@-1372.3,819.5 -1372.3,885.8 -1217.8,1040.3 -856.2,1040.3 -737.2,921.3 427.4,921.3 478,870.7 622.1,870.7 657.7,906.3 v1(1346.8,906.3)
  Bottom Layer w6: v1(1346.8,906.3) P4.9@1346.8,1115
BUS_DETECT: P4.12 R15.1 R16.1 U7.5 | length 3282.2
  Top Layer w6: U7.5@-1267.97,734.85 -1143.05,734.85 R16.1@-1103.3,774.6 R15.1@-1056.2,774.6 -990.1,774.6 -932.2,716.7 -831.4,716.7 -793.1,755 -516.4,755 -470.9,709.5 -370.8,709.5 -201.6,540.3 v1(1090.7,540.3)
  Bottom Layer w6: v1(1090.7,540.3) 1090.7,1125.4 1129.3,1164 1195.8,1164 P4.12@1246.8,1215
BUTTON1: SB4.2 SW1.2 | length 358.3
  Top Layer w6: SW1.2@-2171.97,-1057.86 SW1.2@-1906.23,-1057.86 ; -2039.1,-1057.86 SB4.2@-2039.1,-965.3
BUTTON2: SB5.2 SW2.2 | length 358.3
  Top Layer w6: SW2.2@-1701.04,-1057.86 -1568.9,-1057.86 ; SB5.2@-1568.9,-965.3 -1568.9,-1057.86 ; SW2.2@-1435.29,-1057.86 -1568.9,-1057.86
BUTTON3: SB6.2 SW3.2 | length 358.3
  Top Layer w6: SW3.2@-1262.91,-1057.86 -1130,-1057.86 ; SB6.2@-1130,-965.3 -1130,-1057.86 ; SW3.2@-997.16,-1057.86 -1130,-1057.86
BUTTON4: SB7.2 SW4.2 | length 358.3
  Top Layer w6: SW4.2@-824.77,-1057.86 -691.7,-1057.86 ; SB7.2@-691.7,-965.3 -691.7,-1057.86 ; SW4.2@-559.03,-1057.86 -691.7,-1057.86
C\H\G\: P4.28 SB11.1 U2.8 | length 2807.8
  Top Layer w6: SB11.1@-1871.3,1049.5 v1@-1824.6,1049.5 ; U2.8@-577.26,1061.7 -508.2,1061.7 -482,1035.5 v1(-317.6,1035.5) -186.8,1166.3 398.1,1166.3 P4.28@446.8,1215
  Bottom Layer w6: v1(-1824.5,1049.6) -1660.1,1049.6 -1478.1,867.6 -1360.1,867.6 -1207.8,1019.9 -333.2,1019.9 v1(-317.6,1035.5)
C\T\S\: P4.10 U6.27 U7.32 | length 4981
  Top Layer w6: v1(-1972.1,62.1) -1972.1,205.2 -1820.9,356.4 v1(-1699.4,356.4) ; v3(-1589.4,-169.9) -1589.4,-161.2 -1567.3,-139.1 U6.27@-1567.3,-119.09 ; U7.32@-1293.56,630.52 -1293.8,630.28 v1(-1293.8,517.5) -1164.2,517.5 -1110.5,463.8 -1040.84,463.8 -1039.74,464.9 1176.4,464.9 1194,482.5 v1(1194,514.5) ; P4.10@1343.5,1215 P4.10@1346.8,1215
  Bottom Layer w6: v1(-1972.1,62.1) -1944.4,62.1 -1844.9,-37.4 -1777.68,-37.4 -1777.58,-37.5 -1677.6,-37.5 -1663.4,-51.7 -1663.4,-74.8 -1589.4,-148.8 v3(-1589.4,-169.9) ; v1(-1699.4,356.4) -1660.9,356.4 -1608.2,409.1 -1402.2,409.1 v1(-1293.8,517.5) ; v1(1194,514.5) 1194,1128.5 1226.3,1160.8 1289.3,1160.8 P4.10@1343.5,1215
CENTRAL_B: P2.1 SB12.1 | length 100.1
  Top Layer w6: P2.1@2247.7,687.2 SB12.1@2247.7,787.3
CENTRAL_G: P2.2 SB13.1 | length 100.1
  Top Layer w6: P2.2@2147.7,687.2 SB13.1@2147.7,787.3
CENTRAL_R: P2.3 SB14.1 | length 100.1
  Top Layer w6: P2.3@2047.7,687.2 SB14.1@2047.7,787.3
D\C\D\: P4.14 SB2.2 U7.7 | length 3217.6
  Top Layer w6: U7.7@-1267.97,774.22 -1206.88,774.22 -1189.4,791.7 -1189.4,855.3 -1145,899.7 SB2.2@-1055,899.7 -903.7,899.7 -828.4,824.4 -335.5,824.4 -99.3,588.2 v1(996.7,588.2)
  Bottom Layer w6: v1@996.5,588.2 996.5,1142.6 1023.6,1169.7 1101.5,1169.7 P4.14@1146.8,1215
D\S\R\: P4.15 SB3.2 U7.6 | length 3044.7
  Top Layer w6: U7.6@-1267.97,754.54 -1203.26,754.54 -1171.1,786.7 -1171.1,827.9 -1151.9,847.1 SB3.2@-990.2,847.1 -878,847.1 ; -877.96,847.06 -837.8,806.9 -377.4,806.9 -135.2,564.7 v1(1047,564.7)
  Bottom Layer w6: v1@1046.8,564.7 P4.15@1046.8,1115
D\T\R\: P4.11 U7.31 | length 3355.3
  Top Layer w6: U7.31@-1313.24,630.52 -1313.24,552.46 -1319.4,546.3 -1319.4,511.28 -1303.12,495 -1172.9,495 -1127.9,450 1207.4,450 1245.5,488.1 v1(1245.5,530.3)
  Bottom Layer w6: v1(1245.5,530.3) 1245.5,1113.7 P4.11@1246.8,1115
DEC1: C15.1 U6.1 | length 123.2
  Top Layer w6: U6.1@-1425.56,119.1 C15.1@-1425.56,242.34
DEC2: C21.1 U6.32 | length 223.8
  Top Layer w6: C21.1@-1552.3,-309.4 -1531.9,-289 -1531.9,-263.5 -1480,-211.6 -1480,-172.61 -1488.56,-164.05 U6.32@-1488.56,-119.09
DEC3: C20.1 U6.33 | length 280.4
  Top Layer w6: C20.1@-1552.6,-359.9 -1519.9,-327.2 -1519.9,-283.6 -1466.3,-230 -1466.3,-169.34 -1472.81,-162.83 U6.33@-1472.81,-119.09 U6.33@-1471.68,-119.09
DEC4: C13.1 L3.1 U6.46 | length 183
  Top Layer w6: U6.46@-1393.08,55.12 C13.1@-1286.12,55.12 ; C13.1@-1275.1,44.1 -1248.6,70.6 L3.1@-1210,70.6
EN_5V: P4.25 R12.2 U3.6 U6.17 | length 4712.6
  Top Layer w6: v1(-1801.5,87.1) -1779.1,87.1 -1715.63,23.63 U6.17@-1631.27,23.63 ; v1(-1246.7,201.7) -1063.9,201.7 -1013.4,151.2 v1(-1013.9,151.2) ; v1(-990.1,-182.9) -944.4,-228.6 -944.4,-260.9 -822.8,-382.5 -473.9,-382.5 -425.9,-334.5 v1(547.3,-334.5) ; v1(-771.2,-338.5) -771.2,-293.99 R12.2@-768.6,-291.39 U3.6@-706.24,-291.39 ; P4.25@546.8,1115 546.8,942.2 v1(547,942)
  Bottom Layer w6: v1(-1801.5,87.1) -1693.9,87.1 -1629.9,151.1 -1324.1,151.1 -1273.5,201.7 v1(-1246.7,201.7) ; v1(-1013.9,151.2) -1013.9,-159.1 v1(-990.1,-182.9) ; v1(-867.1,-338.2) -771.5,-338.2 v1(-771.2,-338.5) ; v1(547,942) 547,-334.2 v1(547.3,-334.5)
EN_20V: P4.24 R14.1 U1.5 U6.18 | length 5857.2
  Top Layer w6: v1@-1799.2,31.1 -1790.1,40.2 -1764.5,40.2 -1732.18,7.88 U6.18@-1631.27,7.88 ; v1(-1072.3,-820.3) -1072.3,-822.5 -1035.4,-859.4 -346.7,-859.4 -214.2,-726.9 v1(604.2,-726.9) ; v1(-1070.7,-739.8) -1070.7,-699.3 R14.1@-1070,-698.6 R14.1@-1068.8,-699.8 ; R14.1@-1070,-698.51 U1.5@-713.48,-698.51 ; v1(603.9,909.7) 603.9,908.3 603.8,908.2 603.8,1172 P4.24@646.8,1215
  Bottom Layer w6: v1(-1799.2,40.2) -1665.2,40.2 -1598.8,106.6 -1375.1,106.6 -1196.6,-71.9 -1196.6,-707.7 -1177.4,-726.9 -1117.3,-726.9 -1104.4,-739.8 v1(-1070.7,-739.8) -1072.3,-741.4 v1(-1072.3,-820.3) ; v1(603.9,909.7) 603.9,744.9 603.3,744.3 604.2,743.4 v1(604.2,-726.9)
EN_M2_8V: P4.23 R6.1 U4.3 | length 1710.9
  Top Layer w6: v1(-704.7,539.1) -734.6,539.1 R6.1@-746.2,550.7 -712.3,584.6 U4.3@-685.64,584.6
  Bottom Layer w6: v1(-704.7,539.1) 29.4,539.1 605.3,1115 P4.23@646.8,1115
EN_S2_8V: P4.26 R13.2 U5.3 U6.19 | length 4083.9
  Top Layer w6: v1(-1858.8,63.6) -1858.8,63 -1813.1,17.3 -1762.3,17.3 -1738.9,-6.1 -1631.27,-6.1 U6.19@-1631.27,-7.87 ; v1(-1212.8,169.5) -1090.3,169.5 -1011.1,90.3 v1(-911,90.3) -892.4,71.7 -327.2,71.7 -182.6,216.3 v1(500.6,216.3) ; v1(-829.2,172.1) -799.9,142.8 -760.6,142.8 R13.2@-731.5,171.9 -714.99,188.41 U5.3@-672.84,188.41 ; v1(502.6,901.7) 502.6,1170.8 P4.26@546.8,1215
  Bottom Layer w6: v1(-1858.8,63.6) -1857.9,62.7 -1691.1,62.7 -1620.7,133.1 -1309.5,133.1 -1273.1,169.5 v1(-1212.8,169.5) ; v1(-911,90.3) v1(-829.2,172.1) ; v1@502.6,215.4 v1(502.6,901.7)
FRONTLED: P2.4 SB15.1 | length 100.1
  Top Layer w6: P2.4@1947.7,687.2 SB15.1@1947.7,787.3